# Altium PCB PCB.PcbDoc
Units mil, origin at the board's own origin, x right, y up, seen from the top; angles counter-clockwise.
Board outline 2035 x 5605 mil, 2 copper layers (Top Layer, Bottom Layer); 53 components, 39 nets, 162 pads, 37 vias.
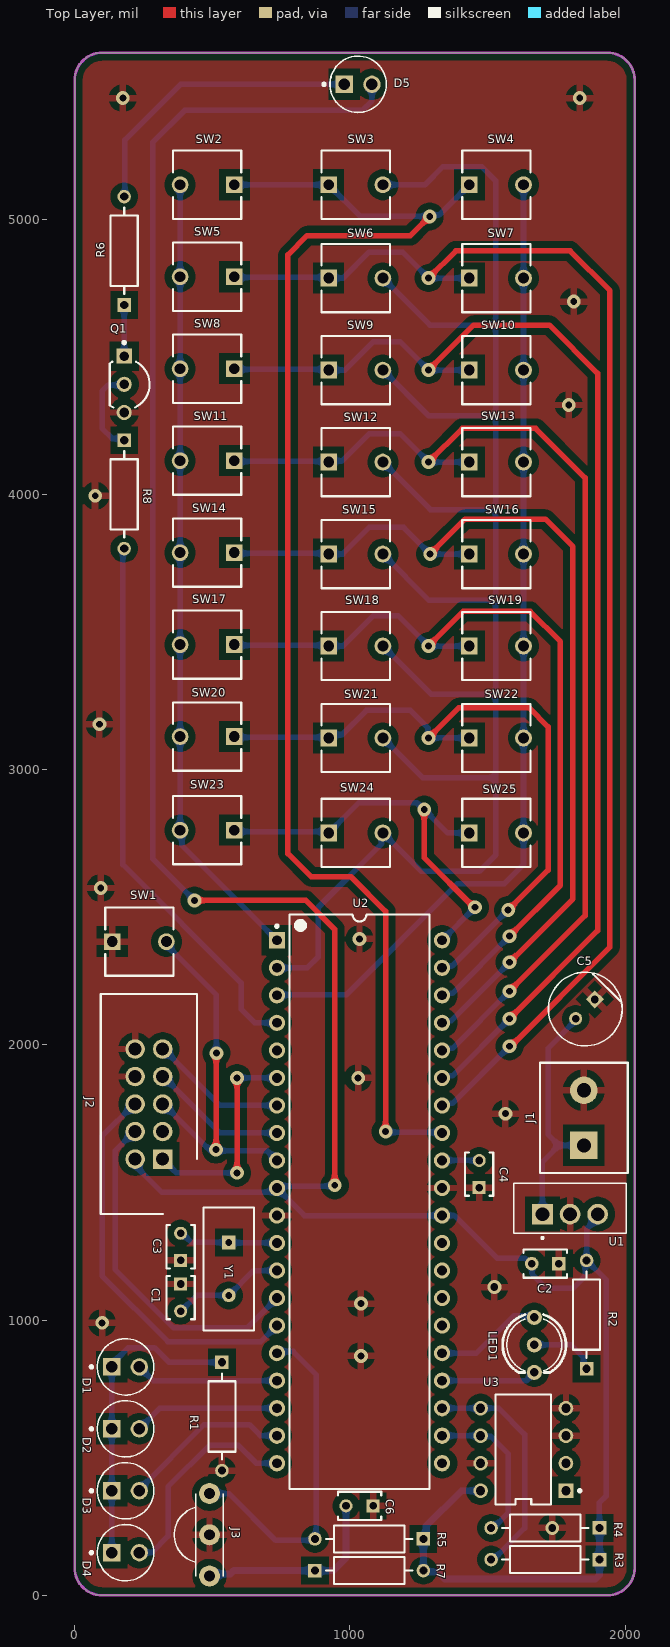
[diagram p0: Top Layer view]
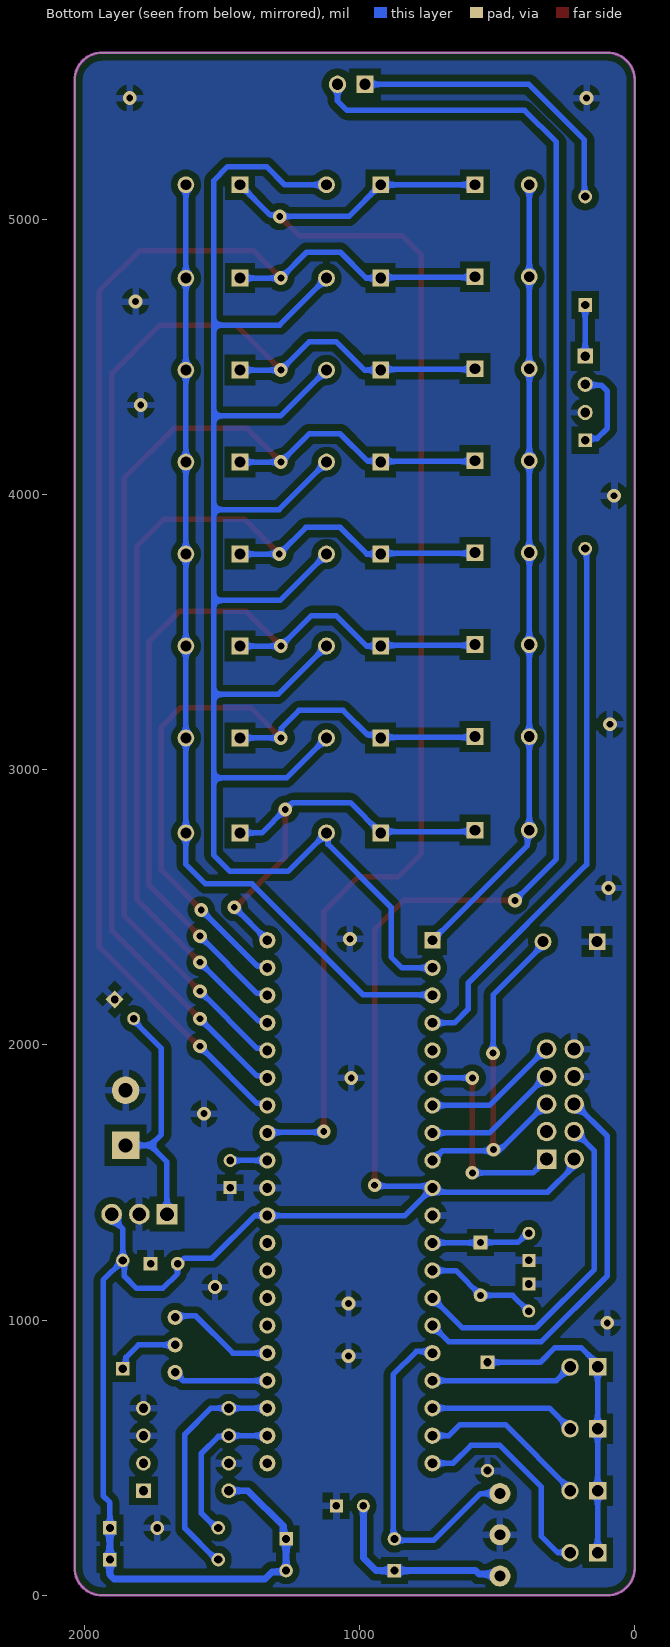
[diagram p1: Bottom Layer view, seen from below]
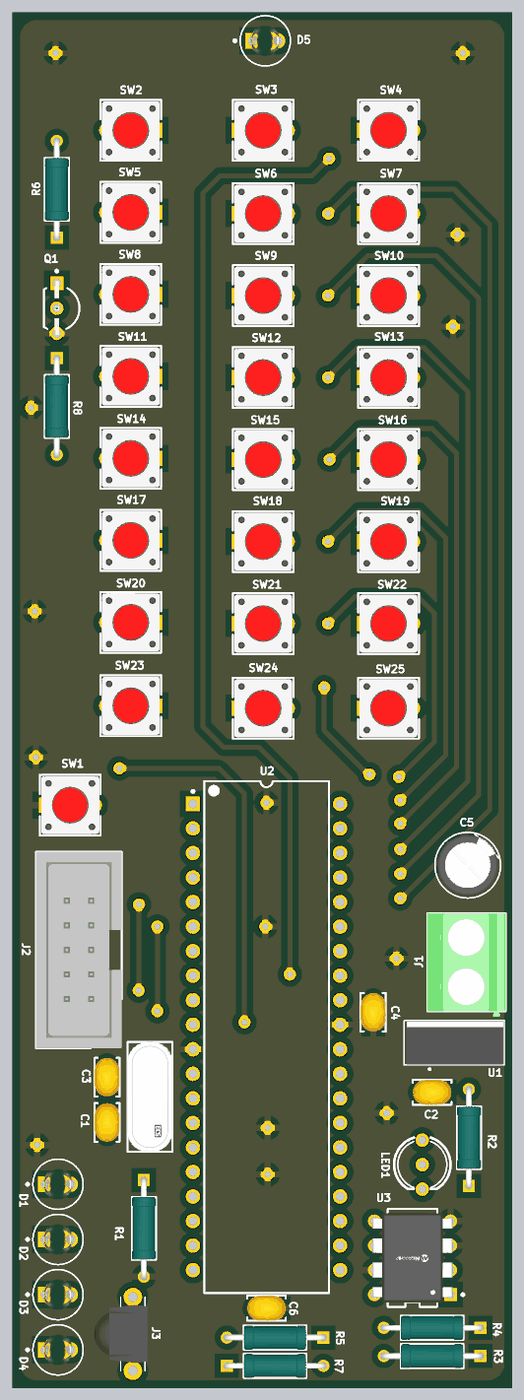
[diagram p2: 3D render of the assembled board from above, using the file's embedded part models]

## Layer stack, top to bottom
Top Solder: solder mask 0.4, Solder Resist, Dk 3.5
Top Layer: signal copper 1.4
Dielectric 1: dielectric 12.6, FR-4, Dk 4.8
Bottom Layer: signal copper 1.4
Bottom Solder: solder mask 0.4, Solder Resist, Dk 3.5

## Board outline
1935,5605 cw(c1935,5505) 2035,5505 2035,5305 2035,100 cw(c1935,100) 1935,0 100,0 cw(c100,100) 0,100 0,295 0,5265 0,5505 cw(c100,5505) 100,5605

## Design rules (kind name [scope] priority, off if disabled: settings)
Clearance [All] p1: gap=25 ignorepadtopadclearanceinfootprint=TRUE
HoleSize [All] p1: absolutevalues=TRUE maxlimit=310 minlimit=25 maxpercent=80.000 minpercent=20.000
HoleToHoleClearance [All] p1: gap=25 allowstackedmicrovias=TRUE
MinimumSolderMaskSliver [All] p1: minsoldermaskwidth=0
PlaneConnect [All] p1: planeconnectstyle=Relief reliefexpansion=20 reliefentries=4 reliefconductorwidth=25 reliefairgap=25
PolygonConnect [All] p1: connectstyle=Relief reliefconductorwidth=25 reliefentries=4 polygonreliefangle="90 Angle" airgapwidth=25
RoutingVias [All] p1: holewidth=25 width=50 viastyle="Through Hole" minholewidth=25 minwidth=48 maxholewidth=35 maxwidth=70
SilkToSolderMaskClearance [IsPad] p1: minsilkscreentomaskgap=2 clearancetoexposedcopper=TRUE
SolderMaskExpansion [All] p1: expansion=4 istentingtop=FALSE
SupplyNets "Schematic Supply Nets_2" [InNet('VCC')] p1: voltage=0.000
SupplyNets "Schematic Supply Nets_1" [InNet('GND')] p2: voltage=0.000
Width [All] p1: maxlimit=40 minlimit=16 preferedwidth=25 minimp=50.000000 maximp=50.000000 favimp=50.000000
25 further rules are at their usual default settings.

## Components (designator, comment, footprint, x,y, rotation, side; value= is the part's Value field where it differs from the comment)
C1 "10p" FP-K155L2-MFG#1 385,1082 r270 top
C2 "K103K15X7RF5TL2" FP-K155L2-MFG#2 1710,1205 r180 top
C3 "10p" FP-K155L2-MFG#1 385,1266.34 r90 top
C4 "100n" FP-K155L2-MFG#1 1470,1530.79 r90 top
C5 "EEUHD1E101" FP-RAD-TH-D_6_3_0_5-L_11-MFG 1855.2,2130.2 r225 top
C6 "K103K15X7RF5TL2" FP-K155L2-MFG#1 1035,325 r180 top
D1 "TLLG4401" FP-6_544-5255_01-4-MFG 185,830 r0 top
D2 "TLLG4401" FP-6_544-5255_01-4-MFG 185,605 r0 top
D3 "TLLG4401" FP-6_544-5255_01-4-MFG 185,380 r0 top
D4 "TLLG4401" FP-6_544-5255_01-4-MFG 185,155 r0 top
D5 "TLLG4401" FP-6_544-5255_01-4-MFG 1030,5490 r0 top
J1 "1729128" PHOE-1729128-2_V 1850,1735 r90 top
J2 "USBASP Connector" SHDR10W99P254_2X5_2032X889X927P 320,1585 r90 top
J3 "TSOP1838" TSOP1838 490,220 r270 top
LED1 "L-59EGW-CA" L-59EGW-CA 1670,910 r180 top
Q1 "BC547" ONSC-TO-92-3-29-11_AM_BL 180,4400 r270 top
R1 "MRS25000C1001FCT00" FP-MRS25-MFG 535,650 r270 top
R2 "220R" FP-MRS25-MFG 1860,1020 r90 top
R3 "4k7" FP-MRS25-MFG 1710,130 r180 top
R4 "4k7" FP-MRS25-MFG 1710,245 r180 top
R5 "1k" FP-MRS25-MFG 1070,205 r180 top
R6 "100R" FP-MRS25-MFG 180,4885 r90 top
R7 "100R" FP-MRS25-MFG 1070,90 r0 top
R8 "10k" FP-MRS25-MFG 180,4000 r270 top
SW1 "EVQ-21505R" FP-EVQ-21505R-MFG 235,2375 r0 top
SW2 "EVQ-21505R" FP-EVQ-21505R-MFG 481.57,5125 r180 top
SW3 "EVQ-21505R" FP-EVQ-21505R-MFG 1021.44,5125 r0 top
SW4 "EVQ-21505R" FP-EVQ-21505R-MFG 1532.37,5125 r0 top
SW5 "EVQ-21505R" FP-EVQ-21505R-MFG 481.57,4790.83 r180 top
SW6 "EVQ-21505R" FP-EVQ-21505R-MFG 1021.44,4785.83 r0 top
SW7 "EVQ-21505R" FP-EVQ-21505R-MFG 1532.37,4785.83 r0 top
SW8 "EVQ-21505R" FP-EVQ-21505R-MFG 481.57,4456.67 r180 top
SW9 "EVQ-21505R" FP-EVQ-21505R-MFG 1021.44,4451.67 r0 top
SW10 "EVQ-21505R" FP-EVQ-21505R-MFG 1532.36,4451.67 r0 top
SW11 "EVQ-21505R" FP-EVQ-21505R-MFG 481.57,4122.5 r180 top
SW12 "EVQ-21505R" FP-EVQ-21505R-MFG 1021.44,4117.5 r0 top
SW13 "EVQ-21505R" FP-EVQ-21505R-MFG 1532.37,4117.5 r0 top
SW14 "EVQ-21505R" FP-EVQ-21505R-MFG 481.57,3788.33 r180 top
SW15 "EVQ-21505R" FP-EVQ-21505R-MFG 1021.44,3783.33 r0 top
SW16 "EVQ-21505R" FP-EVQ-21505R-MFG 1532.37,3783.33 r0 top
SW17 "EVQ-21505R" FP-EVQ-21505R-MFG 481.57,3454.17 r180 top
SW18 "EVQ-21505R" FP-EVQ-21505R-MFG 1021.44,3449.17 r0 top
SW19 "EVQ-21505R" FP-EVQ-21505R-MFG 1532.37,3449.17 r0 top
SW20 "EVQ-21505R" FP-EVQ-21505R-MFG 481.57,3120 r180 top
SW21 "EVQ-21505R" FP-EVQ-21505R-MFG 1021.44,3115 r0 top
SW22 "EVQ-21505R" FP-EVQ-21505R-MFG 1532.37,3115 r0 top
SW23 "EVQ-21505R" FP-EVQ-21505R-MFG 481.57,2780 r180 top
SW24 "EVQ-21505R" FP-EVQ-21505R-MFG 1021.44,2770 r0 top
SW25 "EVQ-21505R" FP-EVQ-21505R-MFG 1532.37,2770 r0 top
U1 "L7805CV" TO255P1040X460X1968-3 1699.61,1385 r0 top
U2 "ATmega32A-PU" 40P6 1035,1430 r0 top
U3 "AT24C02C-PUM" FP-C04-018-P-MFG 1630,530 r180 top
Y1 "16MHz" FP-ECS-80-20-4X-MFG 560,1186.06 r270 top

## Footprints (in the part's own frame and the unit in brackets; to place one, negate y for a bottom-side part, rotate by r counter-clockwise, add the part's x,y. Pads: shape width x height; smd on the part's side, far side on the other; paste and mask are expansions set on the pad)
40P6 [mm] "40-Pin Ceramic Dual In-Line Package (CerDIP)"
  rect 1.5x1.5 hole 0.9: 1(-7.62,24.13)
  round 1.5 hole 0.9: 2(-7.62,21.59) 3(-7.62,19.05) 4(-7.62,16.51) 5(-7.62,13.97) 6(-7.62,11.43) 7(-7.62,8.89) 8(-7.62,6.35) 9(-7.62,3.81) 10(-7.62,1.27) 11(-7.62,-1.27) 12(-7.62,-3.81) 13(-7.62,-6.35) 14(-7.62,-8.89) 15(-7.62,-11.43) 16(-7.62,-13.97) 17(-7.62,-16.51) 18(-7.62,-19.05) 19(-7.62,-21.59) 20(-7.62,-24.13) 21(7.62,-24.13) 22(7.62,-21.59) 23(7.62,-19.05) 24(7.62,-16.51) 25(7.62,-13.97) 26(7.62,-11.43) 27(7.62,-8.89) 28(7.62,-6.35) 29(7.62,-3.81) 30(7.62,-1.27) 31(7.62,1.27) 32(7.62,3.81) 33(7.62,6.35) 34(7.62,8.89) 35(7.62,11.43) 36(7.62,13.97) 37(7.62,16.51) 38(7.62,19.05) 39(7.62,21.59) 40(7.62,24.13)
  silkscreen extent -7.74,-26.5 6.45,26.5, body extent -7.05,-26.47 7.05,26.47, height 5.72
FP-6_544-5255_01-4-MFG [mm]
  rect 1.6x1.6 hole 1.05 paste-2539.97 mask+0: 1(-1.27,0)
  round 1.6 hole 1.05 paste-2539.97 mask+0: 2(1.27,0)
  silkscreen extent -3.27,-2.6 2.6,2.6, body extent -2.32,-2.32 2.32,2.32, height 0.25
FP-C04-018-P-MFG [mm]
  rect 1.35x1.35 hole 0.85 paste-2539.97 mask+0: 1(-3.937,3.81)
  round 1.35 hole 0.85 paste-2539.97 mask+0: 2(-3.937,1.27) 3(-3.937,-1.27) 4(-3.937,-3.81) 5(3.937,-3.81) 6(3.937,-1.27) 7(3.937,1.27) 8(3.937,3.81)
  silkscreen extent -5.34,-5.08 2.56,5.08, body extent -4.71,-5.43 4.71,5.43, height 0.25
FP-ECS-80-20-4X-MFG [mil]
  rect 50x50 hole 25 paste-99999 mask+0: 1(-96.06,0)
  round 50 hole 25 paste-99999 mask+0: 2(96.06,0)
  silkscreen extent -223,-92 223,92, body extent -223,-92 223,92, height 138
FP-EVQ-21505R-MFG [mm]
  rect 1.55x1.55 hole 1 paste-2539.97 mask+0: A(-2.5,0)
  round 1.55 hole 1 paste-2539.97 mask+0: B(2.5,0)
  silkscreen extent -3.15,-3.15 3.15,3.15, body extent -3.37,-3.25 3.37,3.25, height 0.25
FP-K155L2-MFG#1 [mm]
  rect 1.2x1.2 hole 0.7 paste-2539.97 mask+0: 1(-1.25,0)
  round 1.2 hole 0.7 paste-2539.97 mask+0: 2(1.25,0)
  silkscreen extent -2,-1.3 2,1.3, body extent -2.1,-1.4 2.1,1.4, height 0.25
FP-K155L2-MFG#2 [mm]
  rect 1.27x1.27 hole 0.7 paste-2539.97 mask+0: 1(-1.25,0)
  round 1.27 hole 0.7 paste-2539.97 mask+0: 2(1.25,0)
  silkscreen extent -2,-1.3 2,1.3, body extent -2.1,-1.4 2.1,1.4, height 0.25
FP-MRS25-MFG [mm]
  rect 1.25x1.25 hole 0.75 paste-2539.97 mask+0: 1(-5,0)
  round 1.25 hole 0.75 paste-2539.97 mask+0: 2(5,0)
  silkscreen extent -3.98,-1.25 3.97,1.25, body extent -5.72,-1.35 5.72,1.35, height 0.25
FP-RAD-TH-D_6_3_0_5-L_11-MFG [mm]
  rect 1.2x1.2 hole 0.7 paste-2539.97 mask+0: 1(-1.25,0)
  round 1.2 hole 0.7 paste-2539.97 mask+0: 2(1.25,0)
  silkscreen extent -3.4,-3.4 3.4,3.4, body extent -3.5,-3.5 3.5,3.5, height 0.25
L-59EGW-CA [mm]
  round 1.4 hole 0.8: 1(0,2.54) 2(0,0) 3(0,-2.54)
  silkscreen extent -2.92,-2.8 2.92,2.54
ONSC-TO-92-3-29-11_AM_BL [mm] "TO, 3-Leads, Body Dia 4.7mm, Pitch 2.6mm"
  rect 1.4x1.4 hole 0.9: 1(-2.6,0)
  round 1.4 hole 0.9: 2(0,0) 3(2.6,0)
  silkscreen extent -3.97,-1.34 2.13,2.35, body extent -2.84,-1.34 2.84,2.35, height 5.33
PHOE-1729128-2_V [mil] "Receptacle, 2-Leads, Body 8.1x10.16mm, Pitch 5.08mm"
  rect 100x100 hole 51.18: 1(-100,0)
  round 100 hole 51.18: 2(100,0)
  silkscreen extent -200,-159 200,159, body extent -222,-159 200,159, height 394
SHDR10W99P254_2X5_2032X889X927P [mm]
  rect 1.8x1.8 hole 1.2: 1(0,0)
  round 1.8 hole 1.2: 2(0,2.54) 3(2.54,0) 4(2.54,2.54) 5(5.08,0) 6(5.08,2.54) 7(7.62,0) 8(7.62,2.54) 9(10.16,0) 10(10.16,2.54)
  silkscreen extent -5.08,-3.17 15.24,5.72, body extent -5.08,-3.18 15.24,5.72, height 9.27
TO255P1040X460X1968-3 [mm]
  rect 1.91x1.91 / inner round 1.91 / far side rect 1.91x1.91 hole 1.27: 1(0,0)
  round 1.91 hole 1.27: 2(2.55,0) 3(5.1,0)
  silkscreen extent -2.65,-2.29 7.75,2.86, body extent -2.35,-1.71 7.62,2.73, height 19.68
TSOP1838 [mil]
  round 76 hole 39.37: 1(-150,0) 2(0,0) 3(150,0)
  silkscreen extent -150,-128 150,50, body extent -118,-159 118,61, height 404

## Part data
C1 C3: library part CMP-00030-39474934-1, "K103K15X7RF5TL2 Multilayer Ceramic Capacitor, 0.01 uF, 50 V, ± 10%, X7R, Radial Leaded", Case/Package=Dipped, Dielectric=X7R, Dielectric Material=Ceramic, Max Operating Temperature=125°C, Min Operating Temperature=-55°C, Tolerance=10%, Voltage=50V, Capacitance=10p, Depth=2.6mm, Diameter=500µm, Height=4mm, Height - Seated (Max)=5.588mm, Lead Diameter=500µm, Lead Free="Lead Free", Lead Length=30mm, Lead Pitch=2.5mm, Lead/Base Style=Straight, Length=4mm, Mount="PCB, Through Hole", NexarPartId=39474934, Number of Pins=2, Packaging="Cut Tape", Radiation Hardening=No, REACH SVHC=Unknown, RoHS=Compliant, Schedule B=8532240060, Termination=Radial, Thickness=2.6mm, Voltage Rating=50V, Voltage Rating (DC)=50V, Weight=160.004709mg, Width=2.5mm
C2 C6: library part CMP-00030-39474934-1, "K103K15X7RF5TL2 Multilayer Ceramic Capacitor, 0.01 uF, 50 V, ± 10%, X7R, Radial Leaded", Capacitance=100n, Case/Package=Dipped, Dielectric=X7R, Dielectric Material=Ceramic, Max Operating Temperature=125°C, Min Operating Temperature=-55°C, Tolerance=10%, Voltage=50V, Depth=2.6mm, Diameter=500µm, Height=4mm, Height - Seated (Max)=5.588mm, Lead Diameter=500µm, Lead Free="Lead Free", Lead Length=30mm, Lead Pitch=2.5mm, Lead/Base Style=Straight, Length=4mm, Mount="PCB, Through Hole", NexarPartId=39474934, Number of Pins=2, Packaging="Cut Tape", Radiation Hardening=No, REACH SVHC=Unknown, RoHS=Compliant, Schedule B=8532240060, Termination=Radial, Thickness=2.6mm, Voltage Rating=50V, Voltage Rating (DC)=50V, Weight=160.004709mg, Width=2.5mm
C4: library part CMP-00030-39474934-1, "K103K15X7RF5TL2 Multilayer Ceramic Capacitor, 0.01 uF, 50 V, ± 10%, X7R, Radial Leaded", Capacitance=10nF, Case/Package=Dipped, Dielectric=X7R, Dielectric Material=Ceramic, Max Operating Temperature=125°C, Min Operating Temperature=-55°C, Tolerance=10%, Voltage=50V, Depth=2.6mm, Diameter=500µm, Height=4mm, Height - Seated (Max)=5.588mm, Lead Diameter=500µm, Lead Free="Lead Free", Lead Length=30mm, Lead Pitch=2.5mm, Lead/Base Style=Straight, Length=4mm, Mount="PCB, Through Hole", NexarPartId=39474934, Number of Pins=2, Packaging="Cut Tape", Radiation Hardening=No, REACH SVHC=Unknown, RoHS=Compliant, Schedule B=8532240060, Termination=Radial, Thickness=2.6mm, Voltage Rating=50V, Voltage Rating (DC)=50V, Weight=160.004709mg, Width=2.5mm
C5: library part CMP-05427-000916-1, "Aluminum Electrolytic Capacitors (Radial Lead Type) AEC-Q200 Qualified 100uF ±20% 25V", Capacitance=100u, Case/Package=Radial, Max Operating Temperature=105°C, Min Operating Temperature=-55°C, Package Quantity=200, Ripple Current=130mA, Tolerance=20%, Voltage=25V, Construction=RADIAL, Diameter=6.3mm, Height=11.2mm, Height - Seated (Max)=0.5inch, Lead Diameter=0.5mm, Lead Pitch=2.5mm, Lead/Base Style=Straight, Length=11.2mm, Life (Hours)=1000Hour, Mount="Through Hole", Number of Pins=2, Packaging=Bulk, Polarity=Polar, Radiation Hardening=No, REACH SVHC="No SVHC", Ripple Current (AC)=130mA, RoHS Compliant=Yes, Series="Automotive, AEC-Q200, HD", Termination=Radial, Voltage Rating=25V, Voltage Rating (DC)=25V
D1 D2 D3 D4 D5: library part CMP-00030-39390728-1, "TLLG4401 LED, Green, 2mcd, 3mmDia., T-1, +/-25deg, 565nm, 7mA, 1.9V Vf, 20V Vr, 20mW, -40", Ambient Temperature Range High=100°C, Case/Package=Radial, Color=Green, Forward Current=2mA, Forward Voltage=1.9V, Min Operating Temperature=-40°C, Power Dissipation=20mW, Reverse Voltage=6V, Voltage Rating (DC)=2.4V, Depth=3.2mm, Dominant Wavelength=575nm, Height=4.5mm, Illumination Color=Green, Lead Free="Lead Free", Lead Length=23mm, Length=3.2mm, Lens Color=Green, Lens Style="Circular, Colored, Diffused, Dome, Round, Tinted", Lens Transparency=Diffused, Luminous Intensity=2mcd, Max Junction Temperature (Tj)=100°C, Max Operating Temperature=100°C, Mount="Through Hole", NexarPartId=39390728, Number of Elements=1, Number of LEDs=1, Number of Pins=2, Packaging=Bulk, Peak Wavelength=565nm, Radiation Hardening=No, REACH SVHC=Unknown, RoHS=Compliant, Schedule B="8541402000, 8541402000", Test Current=2mA, Viewing Angle=25°, Wavelength=575nm
J1: library part CMP-2000-05815-1, "PCB Terminal Block, 13.5 A, 400 V, 2-Pin THD, RoHS, Bulk", Current Rating=13500mA, Manufacturer="Phoenix Contact", Package Description="2-Pin Through Hole Device, Body 8.1 x 10.16 mm, Pitch 5.08 mm", Package Reference=1729128-2, Package Version=03/2015, Voltage Rating=400V, Datasheet URL=https://datasheet.ciiva.com/16046/1729128-16046181.pdf, Datasheet Version=12/2013, Manufacturer URL=http://www.phoenixcontact.com/, Mounting Technology=ThroughHole, No. of Positions=2, No. of Rows=1, Orientation=Horizontal, Package URL=https://www.phoenixcontact.com/online/portal/pi/pxc/product_detail_page/!ut/p/b1/3VdJjqNKFDxLH8AFycySyWY2ozFsEPOMMQaDOX1XedGL_1Vdm5YXJleknhSKeBkvI6EA8ncAo3AYoDhBQGco6KN7VURTdemj9us_IEKEZo_YHiPAEWEFmDGOHMORkqKYCORBZxgL7ZoaZYcbFFUZ3fqxSY6GOuxydWUuHqz1ynmMFygu583Bob0Ewr6Sd_l-5m-kAueHiB0jpRwZwe58wwtkpxtMYd_LmGcDRU02dRNEyWt6Y2ti5pSyJ_reIkzIulrqApdnbT11V5jnCKbYNCvhEM1MCpPByat_X379-iThf08CI5GfOPqfBeS3BRoBOdD55AKVv0iLwCMq-2BrzXWSGRH7pUGD9uwXQjiph3xL0DKQwdGa0JImiIOmBNOestqgwTHSSs2oOep-78apyXQBvNi8ZLaFjvjWvcaUEBu0MC6Wbe-d6mB0FAebo2lUWinqYaZs5DAYzV0RP9yitUjnGJ0iI9xhZkT42OCQNUJJhkgWINNQLP2JFP6OpMg3JCVg70jqHT0lvKOnhHf0lPuOnnLf0VPuWx6_dxwUIvwk5WMkT0kLL1mh61l2yZVSzG3pYV_bqo-mj6uMKwKwdnnW8Jh5RTOJzMOA5c-eJDaZQw4mTMPH02PvS_ZAqNVjVTo2WyYLkwH_KU1mmmG5kjRhDqPXLwwVHvVOjCM60-fpXvTDfMGW1PVFVS1r4e4yVDk4ZdNbkUHvqPqQSeian4UD39fNKmachqdJ1NJbyk8rXT9mXTvPk3oE5meulKGgiruPJek-4I9hTT6G8ZLOyRSm2RRVbThERQad5OS28hdt4YW4vG0stgYYzsWsK4_7y6DZMjJSCqri1kyiZR5vD7pwIrNR7QwPHTcLTI5qT7eRlpHrdGiupYlqQDJ7zy_CND8fWWBoLRXxk1RVcXiBQwbTD4Xi7KL-FuO94t9xaqweXzH, Packing=Bulk, PartNumber=1729128, Pitch=5.08mm, RoHS=TRUE
J2: "Connector", Manufacturer_Name=Molex, Manufacturer_Part_Number=70246-1001, Mouser Part Number=538-70246-1001, Datasheet Link=http://www.molex.com/pdm_docs/sd/702461001_sd.pdf, Height=9.27mm, Mouser Price/Stock=https://www.mouser.co.uk/ProductDetail/Molex/70246-1001?qs=L7RdmAxh%252BcP9d7Ope9dnAA%3D%3D
J3: "IR Remote Receiver 38KHz 35m 3-Pin", Package=None, Check_prices=https://www.snapeda.com/parts/TSOP1838/Vishay/view-part/?ref=eda, MF=Vishay, MP=TSOP1838, SnapEDA_Link=https://www.snapeda.com/parts/TSOP1838/Vishay/view-part/?ref=snap
LED1: "LED; 5mm; bicolour; red/green; 5mcd; 5mcd; 60Â°; Front: convex; anode", Package=None, Availability=Unavailable, MF=Kingbright, MP=L-59EGW-CA, Price=None, SnapEDA_Link=https://www.snapeda.com/parts/L-59EGW-CA/Kingbright/view-part/885747/?ref=snap
Q1: library part CMP-1048-01604-1, "Amplifier Transistor, NPN Silicon, 3-Pin TO-92, Pb-Free, Ammo Box", Manufacturer="On Semiconductor", PartNumber=BC547BZL1G, ComponentLink1Description="Manufacturer URL", ComponentLink1URL=http://www.onsemi.com/, ComponentLink2Description=Datasheet, ComponentLink2URL=http://www.onsemi.com/pub_link/Collateral/BC546-D.PDF, ComponentLink3Description="Package Specification", ComponentLink3URL=http://www.onsemi.com/pub_link/Collateral/MAC97-D.PDF, DatasheetVersion="Rev. 7", fT Min (MHz)=150, IC Continuous (A)=0.1, Mounting Technology="Through Hole", PackageDescription="3-Pin Transistor Outline, Body 4.825 x 3.685 mm, Pitch 1.27 mm", PackageReference=TO-92-3-29-11_AM_BL, PackageVersion="Rev. AM", Packing="Ammo Box", Polarity=NPN, RoHS=TRUE
R1: library part CMP-02408-000051-1, "RES 1K OHM 0.6W 1% AXIAL", Case/Package=Axial, Max Operating Temperature=155°C, Max Power Dissipation=600mW, Min Operating Temperature=-55°C, Package Quantity=5000, Resistance=1kR, Resistance Tolerance=1%, Resistor Type="Metal Film", Temperature Coefficient=50ppm/°C, Voltage Rating=350V, Construction=Cylindrical, Contact Plating=Tin, Diameter=2.5mm, Lead Diameter=0.6mm, Lead Free="Lead Free", Length=6.5mm, Military Standard=Not, Mount="Through Hole", Number of Pins=2, Number of Terminations=2, Packaging="Tape and Reel", Power Rating=600mW, Radiation Hardening=No, RoHS Compliant=Yes, Series=MRS25, Technology="THIN FILM", Termination=Axial, Tolerance=1%, Voltage Rating (DC)=350V, Weight=0.00776oz, Width=2.5mm
R2 R3 R4 R5 R6 R7 R8: library part CMP-02408-000051-1, "RES 1K OHM 0.6W 1% AXIAL", Case/Package=Axial, Max Operating Temperature=155°C, Max Power Dissipation=600mW, Min Operating Temperature=-55°C, Package Quantity=5000, Resistance Tolerance=1%, Resistor Type="Metal Film", Temperature Coefficient=50ppm/°C, Voltage Rating=350V, Construction=Cylindrical, Contact Plating=Tin, Diameter=2.5mm, Lead Diameter=0.6mm, Lead Free="Lead Free", Length=6.5mm, Military Standard=Not, Mount="Through Hole", Number of Pins=2, Number of Terminations=2, Packaging="Tape and Reel", Power Rating=600mW, Radiation Hardening=No, RoHS Compliant=Yes, Series=MRS25, Technology="THIN FILM", Termination=Axial, Tolerance=1%, Voltage Rating (DC)=350V, Weight=0.00776oz, Width=2.5mm
  R2: Resistance=220R
  R3 R4: Resistance=4k7
  R5: Resistance=1k
  R6 R7: Resistance=100R
  R8: Resistance=10k
SW1 SW2 SW3 SW4 SW5 SW6 SW7 SW8 SW9 SW10 SW11 SW12 SW13 SW14 SW15 SW16 SW17 SW18 SW19 SW20 SW21 SW22 SW23 SW24 SW25: library part CMP-05618-000118-1, "SWITCH TACTILE SPST-NO 0.02A 15V", Actuator Color=Red, Case/Package=Radial, Contact Current Rating=20mA, Contact Resistance=50mR, Max Operating Temperature=70°C, Max Voltage Rating (DC)=15V, Min Operating Temperature=-20°C, Operating Force=1.6N, Package Quantity=1, Actuator Length=1.6mm, Actuator Type=Standard, Contact Plating=Silver, Current Rating=20mA, Depth=6mm, Electrical Life=100000Cycles, Height=5mm, Illumination Type=Non-Illuminated, Lead Free="Lead Free", Length=6mm, Max Current Rating=20mA, Mechanical Life=100000Cycles, Mount="Through Hole", Orientation=Straight, Packaging="Tape and Reel", Series=EVQ2, Size=6mm, Switch Function=Off-Mom, Switch Travel=0.25mm, Termination="PC Pin", Throw Configuration=SPST, Voltage Rating (DC)=15V, Width=6mm
U1: "Linear Voltage Regulator IC Positive Fixed 1 Output 1.5A TO-220", Package="TO-220-3 ON Semiconductor", Availability="In Stock", Check_prices=https://www.snapeda.com/parts/L7805CV/STMicroelectronics/view-part/?ref=eda, MF=STMicroelectronics, MP=L7805CV, Price=None, Purchase-URL=https://pricing.snapeda.com/search/part/L7805CV/?ref=eda, SnapEDA_Link=https://www.snapeda.com/parts/L7805CV/STMicroelectronics/view-part/?ref=snap
U2: library part CMP-0095-00028-2, "8-bit AVR Microcontroller, 2.7-5.5V, 16MHz, 32KB Flash, 1KB EEPROM, 2KB SRAM, 40-pin PDIP, Industrial Grade (-40°C to 85°C)", Code_JEDEC=MS-011-AC, ComponentLink1Description="Manufacturer URL", ComponentLink1URL=http://www.atmel.com/, ComponentLink2Description="ATmega32A Datasheet", ComponentLink2URL=http://www.atmel.com/dyn/resources/prod_documents/doc8155.pdf, ComponentLink3Description="ATmega32A Summary", ComponentLink3URL=http://www.atmel.com/dyn/resources/prod_documents/8155S.pdf, DatasheetVersion="revC, Feb-2011", PackageDescription="40-lead (0.600\"/15.24mm Wide) Plastic Dual Inline Package (PDIP)", PackageReference=40P6, PackageVersion="revB, Sep-2001", RevisionNote="DatasheetVersion updated. URLs added."
U3: library part CMP-00252-77757933-1, "AT24C02C-PUM EEPROM Serial-2Wire 2K-bit 256 x 8 1.8V/2.5V/3.3V/5V 8-Pin PDIP W Bulk - Rail/Tube", Case/Package=DIP, Frequency=1MHz, Max Operating Temperature=85°C, Max Supply Voltage=5.5V, Min Operating Temperature=-40°C, Min Supply Voltage=1.7V, Nominal Supply Current=3mA, Access Time=450ns, Density=2kb, Height=5.334mm, Interface="2-Wire, I2C", Lifecycle Status=Production, Max Frequency=1MHz, Memory Size=256B, Memory Type=EEPROM, Mount="Through Hole", NexarPartId=77757933, Number of Pins=8, Radiation Hardening=No, REACH SVHC="No SVHC", RoHS=Compliant, Schedule B="8542320050, 8542320050"
Y1: library part CMP-1669-00002-3, ESR (Equivalent Series Resistance)=80Ω, Frequency Stability=50ppm, Frequency Tolerance=0.003%, Load Capacitance=20pF, Max Operating Temperature=70°C, Min Operating Temperature=-10°C, Frequency=16MHz, Height=3.5mm, Lead Free="Lead Free", Length=11.3538mm, Mount="Through Hole", NexarPartId=316504, Number of Pins=49, Packaging=Bulk, RoHS=Compliant, Schedule B="8541600025, 8541600025", Termination=Radial, Tolerance=0.003%, Width=4.65mm

## Via types
v1: diameter 50, hole 25, Top Layer to Bottom Layer, 35 vias
v2: diameter 50, hole 28, Top Layer to Bottom Layer, 2 vias

## Nets (pads, with @x,y where several pads share a name; then routed paths per layer and width w, separated by ;. In a path a pad name is that pad's centre, name@x,y a point inside that pad or via, vN(x,y) a via of type N, cw(c..) or ccw(c..) an arc to the next point about the centre after c; other vN are vias at no path point)
COL1: SW2.B SW5.B SW8.B SW11.B SW14.B SW17.B SW20.B SW23.B U2.1 | length 5235.7
  Bottom Layer w20: U2.1 390.04,2724.96 390.04,2773.11 SW23.B ; SW23.B SW17.B ; SW23.B SW17.B ; SW17.B SW8.B SW2.B SW17.B
COL2: SW3.B SW6.B SW9.B SW12.B SW15.B SW18.B SW21.B SW24.B U2.2 | length 6989.5
  Bottom Layer w20: U2.2 845,2280 885,2320 885,2500 1114.64,2729.64 1114.64,2764.78 SW24.B 1259.86,2630 1470,2630 1530,2690 1530,2970 ; SW21.B 1264.87,2970 1530,2970 ; SW18.B 1295.89,3273.15 1530,3273.15 ; SW15.B 1288.2,3615 1530,3615 ; SW12.B 1292.36,3945 1530,3945 ; SW9.B 1286.53,4285 1530,4285 ; SW6.B 1290.7,4615 1530,4615 ; SW3.B 1272.2,5125 1337.71,5190.51 1478.95,5190.51 1530,5139.46 1530,4615 ; 1530,2970 1530,3273.15 ; 1530,3273.15 1530,3615 ; 1530,3615 1530,3945 ; 1530,3945 1530,4285 ; 1530,4285 1530,4615
COL3: SW4.B SW7.B SW10.B SW13.B SW16.B SW19.B SW22.B SW25.B U2.3 | length 3896.2
  Bottom Layer w20: U2.3 737.09,2182.09 987.09,2182.09 1390,2585 1560,2585 1630.79,2655.79 SW25.B SW22.B SW19.B SW16.B SW13.B SW7.B ; SW10.B SW7.B ; SW4.B SW7.B
GND: C1.1 C2.1 C3.1 C4.1 C5.1 C6.1 J1.2 J2.8 J2.10 J3.2 Q1.3 R1.2 SW1.A U1.2 U2.11 U2.31 U3.3 U3.4 U3.7 | length 10.5
  Bottom Layer w20: U3.7@1473.48,473.48 U3.7@1480,480
  Bottom Layer w25: R1.2@535,453.15 cw(c535,452.36) R1.2@535.79,452.36
  other v1: 1040,870 100,990 1040,1060 1565,1750 1030,1880 1035,2385 95,2570 90,3165 75,3995 1795,4325 1813.44,4700.42 175,5440 1835,5440
  other v2: 1735,245 1525,1120
LED_G: LED1.3 U2.25 | length 393
  Bottom Layer w20: U2.25 1460,880 1595,1015 1665,1015 LED1.3
LED_R: LED1.1 U2.24 | length 347.4
  Bottom Layer w20: U2.24 1640,780 LED1.1
MISO: J2.9 U2.7 | length 499.9
  Bottom Layer w20: J2.9 323.14,1985 528.14,1780 U2.7
MOSI: J2.1 U2.6 | length 780.7
  Top Layer w20: v1(590,1535) v1(590,1880)
  Bottom Layer w20: J2.1 370,1535 v1(590,1535) ; v1(590,1880) U2.6
NetC4_2: C4.2 U2.32 | length 135
  Bottom Layer w20: U2.32 C4.2
NetC5_2: C5.2 J1.1 U1.1 | length 918.9
  Bottom Layer w20: U1.1 1699.61,1574.61 1760,1635 ; J1.1@1810,1668.28 1815,1663.28 J1.1@1815,1635 ; C5.2 1820.4,2088.03 1720,1987.63 1720,1675 1760,1635 ; J1.1 J1.1@1815,1635 ; 1760,1635 J1.1@1815,1635
NetC6_2: C6.2 J3.3 R7.1 | length 712.3
  Bottom Layer w25: J3.3 497.5,77.5 565.5,77.5 578,90 R7.1 940,90 985.79,135.79 C6.2
NetD1_1: D1.1 D2.1 D3.1 D4.1 R1.1 | length 1131.9
  Bottom Layer w20: D4.1 D3.1 D2.1 D1.1 D1.1@155,810 ; D1.1@155,850 155,860 195,900 289.93,900 343.08,846.85 R1.1
NetD5_1: D5.1 R6.2 | length 1088.1
  Bottom Layer w20: R6.2 182.82,5084.67 182.82,5287.82 385,5490 D5.1
NetLED1_2: LED1.2 R2.1 | length 243.5
  Bottom Layer w20: LED1.2 1803.15,910 1848.88,864.27 1848.88,834.27 R2.1
NetQ1_1: Q1.1 R6.1 | length 185.8
  Bottom Layer w20: Q1.1 R6.1
NetQ1_2: Q1.2 R8.1 | length 323.2
  Bottom Layer w20: R8.1 173.96,4202.89 137.11,4202.89 100,4240 100,4375 121.8,4396.8 176.8,4396.8 Q1.2
RECEIVE: J3.1 R5.2 U2.16 | length 1235.5
  Bottom Layer w20: J3.1 560,370 730.59,199.41 867.56,199.41 877.65,209.5 877.65,802.35 793.48,886.52 741.52,886.52 U2.16
RESET: J2.5 SW1.B U2.9 | length 1538.3
  Top Layer w20: v1(513.62,1619.21) 514.31,1619.9 514.31,1969.31 v1(515,1970)
  Bottom Layer w20: J2.5 323.14,1785 v1@493.14,1615 ; SW1.B 333.43,2363.9 346.27,2351.05 346.27,2350.58 515,2181.85 v1(515,1970) ; U2.9 700,1615 ; v1@493.14,1615 700,1615 ; v1@493.14,1615 700,1615
ROW1: SW2.A SW3.A SW4.A U2.33 | length 5146.3
  Top Layer w20: v1(1130,1685) 1130,2485 1005,2610 860,2610 775,2695 775,4870 845,4940 1220,4940 v1(1290,5010)
  Bottom Layer w20: SW2.A SW3.A 1038.02,5010 v1(1290,5010) 1295.74,5015.74 1324.68,5015.74 SW4.A ; v1(1130,1685) 1132.5,1682.5 1332.5,1682.5 U2.33
ROW2: SW5.A SW6.A SW7.A U2.34 | length 4927.5
  Top Layer w20: v1(1285.83,4785.83) 1385,4885 1800,4885 1945,4740 1945,2355 1585,1995 v1(1580,1995)
  Bottom Layer w20: SW5.A 582.5,4788.33 920.51,4788.33 SW6.A 975.83,4785.83 1070,4880 1191.67,4880 v1(1285.83,4785.83) SW7.A ; U2.34 1342.09,1787.09 1372.09,1787.09 v1(1580,1995)
ROW3: SW8.A SW9.A SW10.A U2.35 | length 4515.6
  Top Layer w20: v1(1285.83,4451.66) 1449.17,4615 1725,4615 1900,4440 1900,2415 v1(1580,2095)
  Bottom Layer w20: SW8.A 582.5,4454.17 920.51,4454.17 SW9.A 981.66,4451.66 1085,4555 1182.5,4555 v1(1285.83,4451.66) ; v1@1277.72,4451.66 SW10.A ; U2.35 1342.09,1887.09 1372.09,1887.09 v1(1580,2095)
ROW4: SW11.A SW12.A SW13.A U2.36 | length 3948.4
  Top Layer w20: v1(1285.83,4117.5) 1408.33,4240 1675,4240 1855,4060 1855,2470 v1(1580,2195)
  Bottom Layer w20: SW11.A 582.5,4120 920.51,4120 SW12.A 927.32,4121.81 971.81,4121.81 1070,4220 1183.33,4220 v1(1285.83,4117.5) SW13.A ; U2.36 1342.09,1987.09 1372.09,1987.09 v1(1580,2195)
ROW5: SW14.A SW15.A SW16.A U2.37 | length 3489.7
  Top Layer w20: v1(1291.67,3783.33) 1418.33,3910 1710,3910 1810,3810 1810,2530 v1(1580,2300)
  Bottom Layer w20: SW14.A 582.5,3785.83 920.51,3785.83 SW15.A 973.33,3783.33 1070,3880 1195,3880 v1(1291.67,3783.33) SW16.A ; U2.37 1342.47,2087.47 1367.47,2087.47 v1(1580,2300)
ROW6: SW17.A SW18.A SW19.A U2.38 | length 3005.4
  Top Layer w20: v1(1285.83,3449.17) 1411.67,3575 1655,3575 1765,3465 1765,2580 v1(1580,2395)
  Bottom Layer w20: SW17.A 582.5,3451.67 920.51,3451.67 SW18.A 974.17,3449.17 1085,3560 1175,3560 v1(1285.83,3449.17) SW19.A ; U2.38 1342.09,2187.09 1372.09,2187.09 v1(1580,2395)
ROW7: SW20.A SW21.A SW22.A U2.39 | length 2519.6
  Top Layer w20: v1(1285.83,3115) 1395.83,3225 1650,3225 1720,3155 1720,2635 v1(1575,2490)
  Bottom Layer w20: SW20.A 582.5,3117.5 920.51,3117.5 SW21.A 934.82,3126.81 971.81,3126.81 1060,3215 1220,3215 1284.03,3150.97 1284.03,3116.81 v1(1285.83,3115) SW22.A ; U2.39 1342.47,2287.47 1372.47,2287.47 v1(1575,2490)
ROW8: SW23.A SW24.A SW25.A U2.40 | length 1553.5
  Top Layer w20: v1(1270,2855) 1270,2680 1450,2500 v1(1455,2500)
  Bottom Layer w20: SW23.A 585,2775 918.01,2775 SW24.A 1033.01,2880 1243.28,2880 1268.28,2855 v1(1270,2855) 1355,2770 SW25.A ; U2.40 v1(1455,2500)
RX: J2.4 U2.14 | length 1253.6
  Bottom Layer w20: J2.4 216.86,1685 147.07,1615.21 147.07,1184.28 359.68,971.66 626.67,971.66 U2.14
SCK: J2.7 U2.8 | length 499.9
  Bottom Layer w20: J2.7 323.14,1885 528.14,1680 U2.8
SCL: R4.2 U2.22 U3.6 | length 572.2
  Bottom Layer w20: U2.22 U3.6@1480,580 ; U3.6 1477.5,577.5 1512.5,577.5 1575,515 1575,298.95 1521.05,245 R4.2
SDA: R3.2 U2.23 U3.5 | length 854.5
  Bottom Layer w20: U2.23 U3.5@1480,680 ; U3.5 1540,680 1635,585 1635,243.95 1521.05,130 R3.2
SEL1: D1.2 U2.17 | length 520.7
  Bottom Layer w20: D1.2 285,780 U2.17
SEL2: D2.2 U2.18 | length 531.1
  Bottom Layer w20: D2.2 310,680 U2.18
SEL3: D3.2 U2.19 | length 618.9
  Bottom Layer w20: D3.2 235,385 470,620 635,620 675,580 U2.19
SEL4: D4.2 U2.20 | length 793.9
  Bottom Layer w20: D4.2 235.98,155.99 280.98,155.99 340,215 340,395 490,545 595,545 660,480 U2.20
TRANS: R8.2 U2.4 | length 2004
  Bottom Layer w20: R8.2 175,3798.15 175,2655 605,2225 605,2130 655,2080 U2.4
TX: J2.6 U2.15 | length 1434.1
  Bottom Layer w20: J2.6 216.86,1785 100,1668.14 100,1160.64 338.97,921.66 676.67,921.66 U2.15
VCC: C2.2 D5.2 J2.2 R2.2 R3.1 R4.1 R5.1 R7.2 U1.3 U2.10 U2.30 U3.8 | length 9832.2
  Top Layer w20: v1(435,2525) 840,2525 945,2420 v1@945,1491.72
  Bottom Layer w20: J2.2 228.78,1576.22 228.78,1552.32 316.1,1465 710.79,1465 725.79,1480 U2.10 ; v1(435,2525) 284.61,2675.39 284.61,5279.61 400,5395 1045,5395 1080,5430 D5.2 ; v1(945,1490) 941.92,1486.92 741.92,1486.92 U2.10 ; U1.3 1900.39,1371.42 1860,1331.02 R2.2 ; R4.1 1906.85,336.85 1931.85,361.85 1931.85,1145 R2.2 ; U2.10 835,1380 U2.30 1380,1380 1535,1225 1635.45,1225 1655.45,1205 C2.2 1661.78,1204 1661.78,1168.22 1715,1115 1810,1115 1854.41,1159.41 1854.41,1211.26 R2.2
  Bottom Layer w25: R5.1 1276.85,215 1276.85,251.85 1405,380 U3.8 ; R5.1@1276.85,205 1266.85,195 R7.2 1271.48,85.37 1318.18,85.37 1343.54,60 1892.21,60 1906.85,74.64 R4.1
XTAL1: C1.2 U2.13 Y1.2 | length 411
  Bottom Layer w20: C1.2 386.85,1032.79 444.07,1090 Y1.2 650,1180 U2.13
XTAL2: C3.2 U2.12 Y1.1 | length 364.7
  Bottom Layer w20: C3.2 391.02,1315.55 424.45,1282.13 Y1.1 561.06,1281.06 733.94,1281.06 U2.12
pads on no net: J2.3 U2.5 U2.21 U2.26 U2.27 U2.28 U2.29 U3.1 U3.2

## Polygon pours and split planes (outlines as drawn)
GND on Top Layer "GND_L01_P000" (solid, remove dead copper, pour order 0): 0,5505 cw(c100,5505) 100,5605 1935,5605 cw(c1935,5505) 2035,5505 2035,100 cw(c1935,100) 1935,0 100,0 cw(c100,100) 0,100 0,155
GND on Bottom Layer "GND_L02_P001" (solid, remove dead copper, pour order 1): 0,5505 cw(c100,5505) 100,5605 1935,5605 cw(c1935,5505) 2035,5505 2035,100 cw(c1935,100) 1935,0 100,0 cw(c100,100) 0,100 0,155

## Keep-outs
Keep-Out Layer:
  lines w10: 0,100 ccw(c100,100) 100,0 1935,0 ccw(c1935,100) 2035,100 2035,5505 ccw(c1935,5505) 1935,5605 100,5605 ccw(c100,5505) 0,5505 0,100